# EAGLE board FridgeWarninig_0.5 (EAGLE 7.3.0)
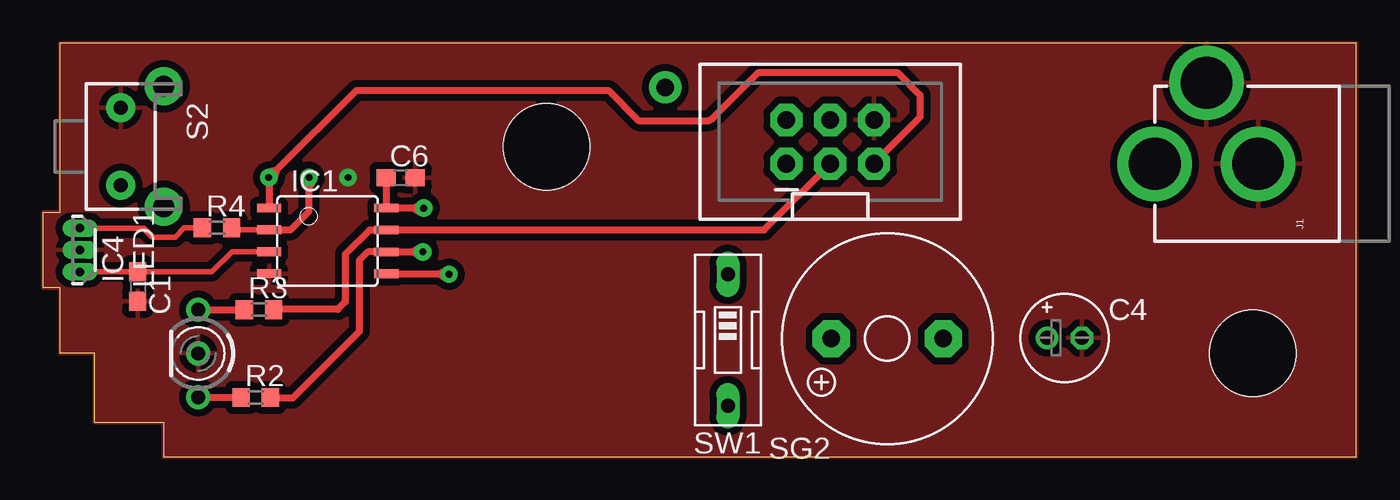
[diagram p0: board, top side]
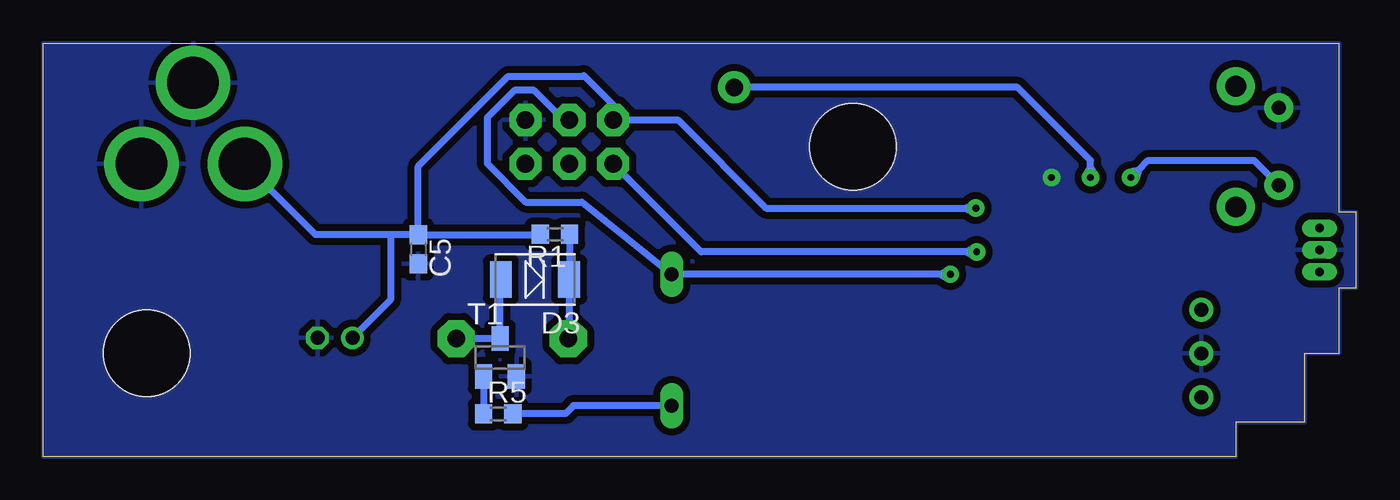
[diagram p1: board, bottom side, seen from below]

Size 76.2 x 24 mm. Coordinates in mm from the lower left corner, seen from the top.
Outline: 7,0 76.2,0 76.2,24 1,24 1,14.2 0,14.2 0,9.8 1,9.8 1,6 3,6 3,2 7,2 7,0
Copper layers (1*16): Top 0.035mm / dielectric 1.5mm / Bottom 0.035mm
Design rules "DesignRule_Home *": minimum track width 8mil, minimum drill 0.4mm, track to track 16mil, track to pad 16mil, pad to pad 10mil, via to via 10mil, smd to smd 8mil, copper to edge 0mil, drill to drill 8mil, minimum pad ring 10mil, minimum via ring 12mil, stop-mask expansion 0mil, vias tented up to drill 0mil, thermal gap 16mil
Holes 5 mm at 29.2,18 70.2,6
tKeepout: area 24.2,13 to 34.2,23; area 65.3,1 to 75.3,11

## Footprints (pad centres in the part's own frame; a part is rotated, then mirrored left to right if it is on the bottom)
C0603 = smd 1.1 x 1: 1 -0.85,0; 2 0.85,0
E2-5 = drill 0.813 pad 1.27: + -1.016,0 | drill 0.813 pad 1.27 octagon: - 1.016,0
DO-214AC = smd 1.27 x 2.1: 1 -1.98,0; 2 1.98,0
8S2 = smd 0.5 x 1.4: 1 -1.905,-3.404; 2 -0.645,-3.404; 3 0.625,-3.404; 4 1.895,-3.404; 5 1.905,3.404; 6 0.635,3.404; 7 -0.635,3.404; 8 -1.905,3.404
SIP3-UA = drill 0.5 pad 0.7 long: 1 -1.27,0; 2 0,0; 3 1.27,0
POWER_JACK_PTH = drill 2.997 pad 4.318: GND 0,7.7; GNDBREAK 4.7,10.7; PWR 0,13.7
2X3-SHROUDED = drill 1.016 pad 1.88 octagon: 1 -1.27,2.54; 2 1.27,2.54; 3 -1.27,0; 4 1.27,0; 5 -1.27,-2.54; 6 1.27,-2.54
1X01NS-KIT = drill 1.016 pad 1.88: 1 0,0
DUOLED-A-3MM = drill 0.8 pad 1.4: 1 -2.54,0; 2 0,0; 3 2.54,0
R0603 = smd 1 x 1.1: 1 -0.85,0; 2 0.85,0
TACTILE-PTH-SIDEEZ = drill 0.8 pad 1.7: 1 -2.25,0; 2 2.25,0 | drill 1.2 pad 2.2: ANCHOR1 -3.5,2.5; ANCHOR2 3.5,2.5
F/TMB = drill 1.016 pad 2.159 octagon: + 3.25,0; - -3.25,0
EDG-01 = drill 0.813 long: 1 0,-3.81; 2 0,3.81
SOT23 = smd 1 x 1.4: 1 -0.95,-1.1; 2 0.95,-1.1; 3 0,1.1

## Placement (x,y rotation side)
C1  100n  [C0603]  5.5,9.88 270 top
C4  10uF  [E2-5]  59.27,6.9 0 top
C5  100n  [C0603]  54.43,12.05 270 bottom
C6  100n  [C0603]  20.74,16.19 0 top
D3  [DO-214AC]  47.66,10.29 180 bottom
IC1  TINY13-20SU  [8S2]  16.51,12.53 270 top
IC4  A1302UA  [SIP3-UA]  2.13,12 90 top
J1  POWER_JACKPTH  [POWER_JACK_PTH]  78.2,17 90 top
JP1  [2X3-SHROUDED]  45.67,18.27 90 top
JP2  M01NOSILK-KIT  [1X01NS-KIT]  36.1,21.44 0 top
LED1  L-115WEGW-CA  [DUOLED-A-3MM]  9,6 90 top
R1  200  [R0603]  46.51,12.91 180 bottom
R2  150  [R0603]  12.35,3.45 0 top
R3  150  [R0603]  12.53,8.55 0 top
R4  1k  [R0603]  10.09,13.28 0 top
R5  2k  [R0603]  49.79,2.49 0 bottom
S2  SWITCH-MOMENTARY-2SIDE_EZ  [TACTILE-PTH-SIDEEZ]  4.5,18 270 top
SG2  F/TMB  [F/TMB]  48.98,6.86 180 top
SW1  [EDG-01]  39.73,6.78 180 top
T1  BC847  [SOT23]  49.69,5.77 0 bottom

## Library data of the parts
C1 C5 C6 R1-R5 = resistor
C4 = rcl
D3 = dp_devices
IC1 = atmel; MPN: ATTINY13-20SU; OC_FARNELL: 9171568; OC_NEWARK: 96K6522
IC4 = dea; MF: ALLEGRO MICROSYSTEMS, INC.; MPN: A1302EUA-T; OC_FARNELL: 1521708; OC_NEWARK: 31K6639
J1 = SparkFun-Connectors; PROD_ID: PRT-00119
JP1 = SparkFun-Connectors; PROD_ID: CONN-10681
JP2 = SparkFun-Connectors
LED1 = led
S2 = dea
SG2 = dea; OC_FARNELL: unknown; OC_NEWARK: unknown
SW1 = special
T1 = transistor

## Nets
GND: C1.2 C4.- C5.2 C6.2 IC1.4 IC4.2 J1.GND J1.GNDBREAK JP1.6 LED1.2 S2.1 T1.2
GREEN_LED: LED1.1 R2.1
HALL_SENSOR: IC4.3 R4.1
HALL_SWITCH: C1.1 IC1.3 IC4.1
MISO: IC1.6 JP1.1 R2.2
MOSI: IC1.5 JP1.4 SW1.1
N$2: R5.2 SW1.2
N$4: D3.2 SG2.- T1.3
N$5: IC1.2 JP2.1 R4.2
N$6: D3.1 R1.1 SG2.+
N$7: R5.1 T1.1
RED_LED: LED1.3 R3.1
RESET: IC1.1 JP1.5 S2.2
SCK: IC1.7 JP1.3 R3.2
VCC: C4.+ C5.1 C6.1 IC1.8 J1.PWR JP1.2 R1.2

## Tracks (layer width: path | path; a pad name or v marks a point on that pad's centre or on a via)
GND  (via drill 0.4)
  other vias: 17.69,16.21
  pour Top: 7,0 7,2 3,2 3,6 1,6 1,9.8 0,9.8 0,14.2 1,14.2 1,24 76.2,24 76.2,0
  pour Bottom: 7,0 7,2 3,2 3,6 1,6 1,9.8 0,9.8 0,14.2 1,14.2 1,24 76.2,24 76.2,0
GREEN_LED
  Top 0.406: LED1.1 11.48,3.46 R2.1
HALL_SENSOR
  Top 0.305: R4.1 8.19,13.28 7.66,12.75 6.36,12.75 5.85,13.26 IC4.3
HALL_SWITCH
  Top 0.305: IC1.3 10.96,11.9 9.79,10.73 C1.1 IC4.1
MISO  (via drill 0.4)
  Top 0.406: R2.2 13.24,3.4 14.49,3.4 18.35,7.26 18.35,11.4 18.84,11.89 IC1.6 21.43,11.89 | 21.43,11.89 v22.03,11.89 | v22.03,11.89 | 21.43,11.89 21.88,11.63 v22.03,11.89 | 21.43,11.89 21.88,12.15 v22.03,11.89
  Bottom 0.406: v22.03,11.89 22.63,11.89 | 22.63,11.89 38.02,11.89 JP1.1 | 22.63,11.89 22.18,12.15 v22.03,11.89 | 22.63,11.89 22.18,11.63 v22.03,11.89
MOSI  (via drill 0.4)
  Top 0.406: 45.65,19.56 JP1.4 | IC1.5 22.96,10.62 | 22.96,10.62 23.55,10.62 v23.55,10.59 | 22.96,10.62 23.39,10.34 v23.55,10.59 | 22.96,10.62 23.42,10.86 v23.55,10.59
  Bottom 0.406: JP1.4 45.68,19.56 46.01,19.56 47.71,21.26 48.85,21.26 50.43,19.68 50.43,17.02 48.19,14.78 44.94,14.78 SW1.1 24.16,10.59 | v23.55,10.59 24.16,10.59 | 24.16,10.59 23.71,10.85 v23.55,10.59 | 24.16,10.59 23.71,10.33 v23.55,10.59
N$1
  pour Top: 7,0 7,2 3,2 3,6 1,6 1,9.8 0,9.8 0,14.2 1,14.2 1,24 76.2,24 76.2,0
N$2
  Bottom 0.406: SW1.2 45.42,2.97 45.88,2.52 48.92,2.52 R5.2
N$3
  pour Bottom: 7,0 7,2 3,2 3,6 1,6 1,9.8 0,9.8 0,14.2 1,14.2 1,24 76.2,24 76.2,0
N$4
  Bottom 0.406: D3.2 49.69,10.23 T1.3 SG2.-
N$5  (via drill 0.4)
  Top 0.305: R4.2 11.06,13.17 IC1.2
  Top 0.406: IC1.2 14.35,13.17 15.43,14.25 15.43,15.61 | 15.43,15.61 v15.43,16.2 | 15.43,15.61 15.69,16.05 v15.43,16.2 | 15.43,15.61 15.17,16.05 v15.43,16.2
  Bottom 0.406: v15.43,16.2 15.43,16.8 | 15.43,16.8 15.43,17.2 19.67,21.44 JP2.1 | 15.43,16.8 15.17,16.36 v15.43,16.2 | 15.43,16.8 15.69,16.36 v15.43,16.2
N$6
  Bottom 0.305: 45.68,6.91 SG2.+
  Bottom 0.406: R1.1 45.66,10.31 D3.1 45.68,6.91
N$7
  Bottom 0.406: T1.1 R5.1
RED_LED
  Top 0.406: LED1.3 R3.1
RESET  (via drill 0.4)
  Top 0.406: v13.09,16.2 13.11,16.19 13.53,16.61 | 13.53,16.61 18.18,21.26 32.8,21.26 34.55,19.51 38.64,19.51 38.82,19.61 41.51,22.3 49.56,22.3 50.89,20.98 50.89,19.71 48.21,17.03 JP1.5 | 13.53,16.61 13.03,16.5 v13.09,16.2 | 13.53,16.61 13.38,16.12 | v13.09,16.2 13.38,16.12 | 13.38,16.12 13.11,16.12 IC1.1
  Bottom 0.406: v13.09,16.2 12.67,16.63 | 12.67,16.63 12.1,17.2 5.95,17.2 S2.2 | 12.67,16.63 12.8,16.13 v13.09,16.2 | 12.67,16.63 13.17,16.5 v13.09,16.2
SCK
  Top 0.406: R3.2 13.39,8.56 17.1,8.56 17.54,8.99 17.54,11.76 18.93,13.16 19.9,13.16 IC1.7 41.83,13.16 JP1.3
VCC  (via drill 0.4)
  Top 0.406: v22.08,14.43 21.48,14.43 | 21.48,14.43 IC1.8 19.89,14.46 C6.1 | 21.48,14.43 21.93,14.17 v22.08,14.43 | 21.48,14.43 21.93,14.69 v22.08,14.43
  Bottom 0.406: C5.1 56.04,12.9 | C5.1 54.43,16.85 49.21,22.07 44.89,22.07 44.84,22.12 43.13,20.41 JP1.2 39.36,19.54 34.25,14.43 22.68,14.43 | C4.+ 56.04,9.11 56.04,12.9 | C5.1 47.37,12.9 R1.2 | 22.68,14.43 v22.08,14.43 | 56.04,12.9 60.4,12.9 J1.PWR | 22.68,14.43 22.23,14.69 v22.08,14.43 | 22.68,14.43 22.23,14.17 v22.08,14.43